# Altium PCB Switch Expand.PcbDoc
Units mil, origin at the board's own origin, x right, y up, seen from the top; angles counter-clockwise.
Board outline 3275 x 7000 mil, 2 copper layers (Top Layer, Bottom Layer); 16 components, 17 nets, 64 pads, 0 vias.
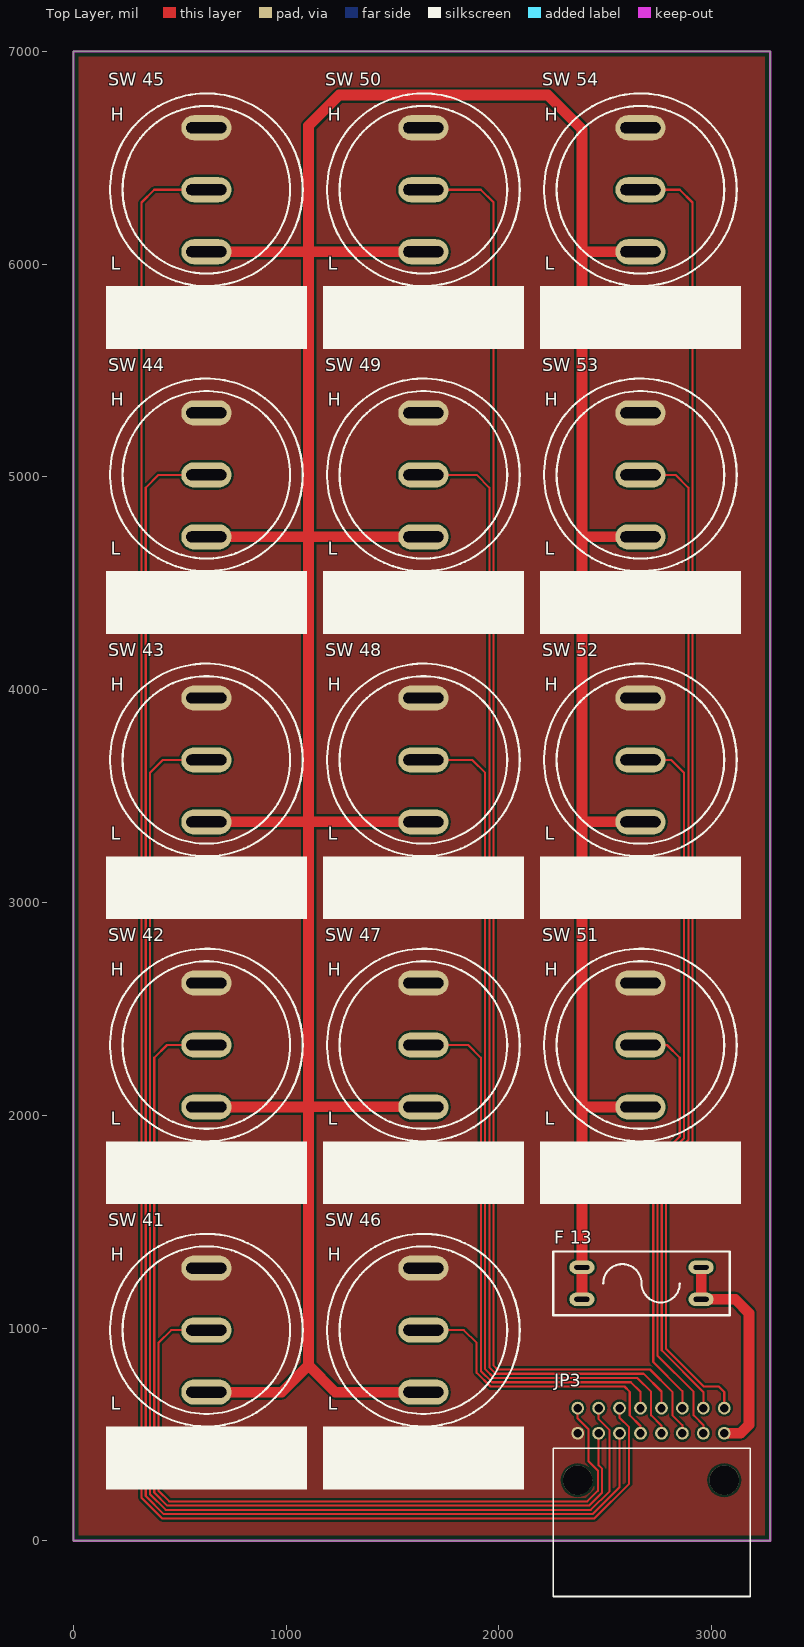
[diagram p0: Top Layer view]
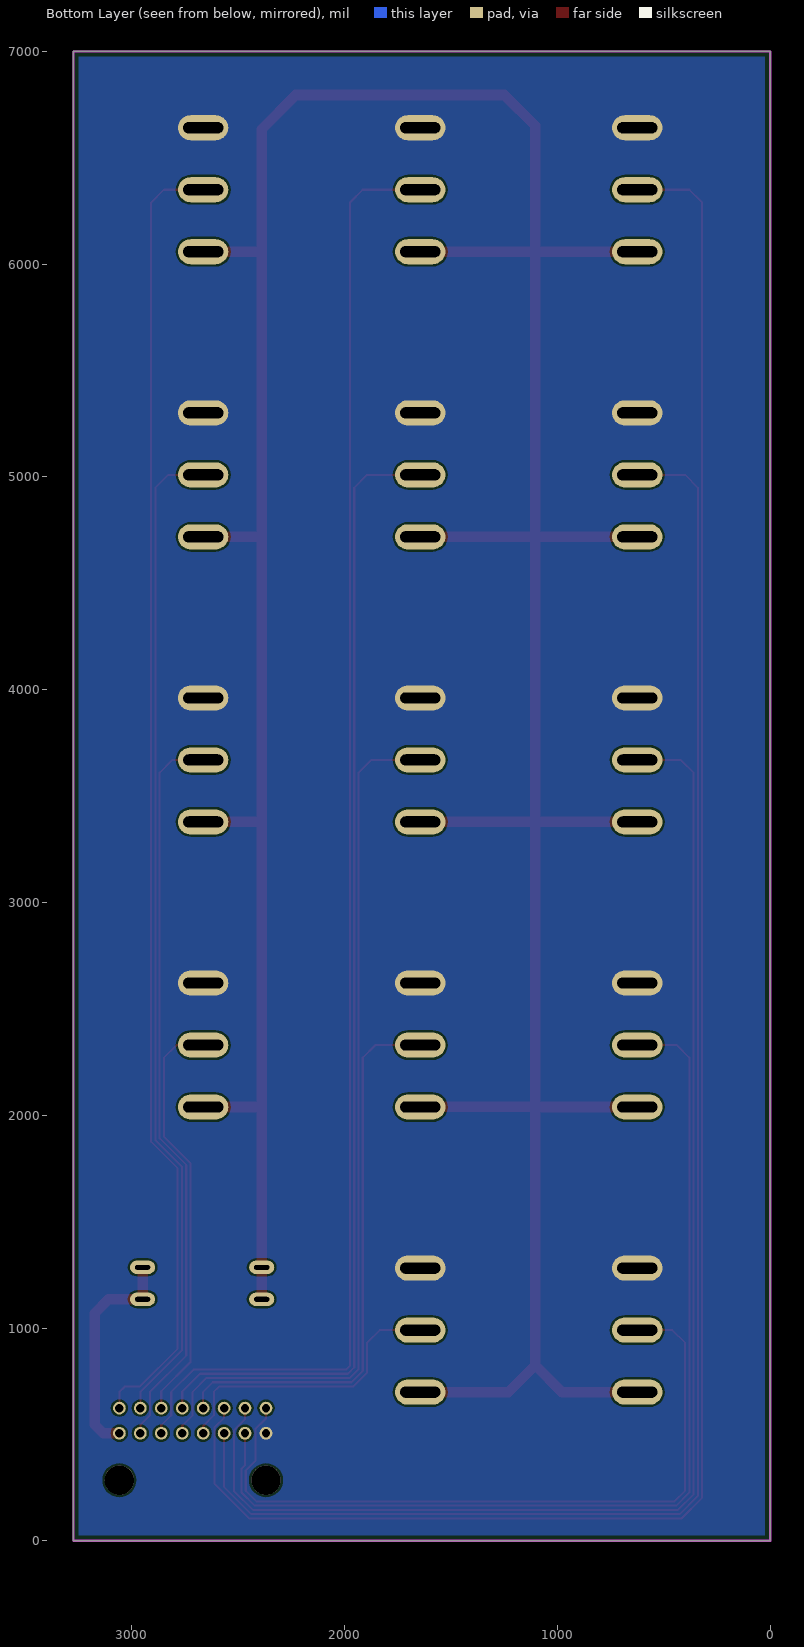
[diagram p1: Bottom Layer view, seen from below]

## Layer stack, top to bottom
Top Layer: signal copper 1.4
Dielectric: dielectric 12.6, FR-4, Dk 4.8
Bottom Layer: signal copper 1.4

## Board outline
0,0 0,7000 3275,7000 3275,0

## Design rules (kind name [scope] priority, off if disabled: settings)
Clearance [All] p1: gap=10
PolygonConnect [All] p1: connectstyle=Direct reliefconductorwidth=10 reliefentries=4 polygonreliefangle="90 Angle" airgapwidth=10
RoutingVias [All] p1: holewidth=28 width=50 viastyle="Through Hole" minholewidth=28 minwidth=50 maxholewidth=28 maxwidth=50
SolderMaskExpansion [All] p1: expansion=4
Width [All] p1: maxlimit=100 minlimit=10 preferedwidth=10
28 further rules are at their usual default settings.

## Components (designator, comment, footprint, x,y, rotation, side; value= is the part's Value field where it differs from the comment)
"F 13" "Fuse" FUSE-2pin 2670,1210 r180 top
JP3 "1318832-2" AMP1318832-2 2370,285 r0 top
"SW 41" "SW-SPDT" Switch-KCD1 625,990 r0 top
"SW 42" "SW-SPDT" Switch-KCD1 625,2330 r0 top
"SW 43" "SW-SPDT" Switch-KCD1 625,3670 r0 top
"SW 44" "SW-SPDT" Switch-KCD1 625,5010 r0 top
"SW 45" "SW-SPDT" Switch-KCD1 625,6350 r0 top
"SW 46" "SW-SPDT" Switch-KCD1 1645,990 r0 top
"SW 47" "SW-SPDT" Switch-KCD1 1645,2330 r0 top
"SW 48" "SW-SPDT" Switch-KCD1 1645,3670 r0 top
"SW 49" "SW-SPDT" Switch-KCD1 1645,5010 r0 top
"SW 50" "SW-SPDT" Switch-KCD1 1645,6350 r0 top
"SW 51" "SW-SPDT" Switch-KCD1 2665,2330 r0 top
"SW 52" "SW-SPDT" Switch-KCD1 2665,3670 r0 top
"SW 53" "SW-SPDT" Switch-KCD1 2665,5010 r0 top
"SW 54" "SW-SPDT" Switch-KCD1 2665,6350 r0 top

## Footprints (in the part's own frame and the unit in brackets; to place one, negate y for a bottom-side part, rotate by r counter-clockwise, add the part's x,y. Pads: shape width x height; smd on the part's side, far side on the other; paste and mask are expansions set on the pad)
AMP1318832-2 [mm] "AMP1318832-2"
  round 3.5 hole 3.5: " "(0,0) " "(17.5,0)
  round 1.524 hole 1: B1(17.5,8.6) B2(15,8.6) B3(12.5,8.6) B4(10,8.6) B5(7.5,8.6) B6(5,8.6) B7(2.5,8.6) B8(0,8.6) B9(17.5,5.6) B10(15,5.6) B11(12.5,5.6) B12(10,5.6) B13(7.5,5.6) B14(5,5.6) B15(2.5,5.6) B16(0,5.6)
  silkscreen extent -2.91,-13.9 20.59,3.8
FUSE-2pin [mm] "车用保险丝"
  oval 3x1.6 hole 0.55 slot 1.8 at 0 deg: 1(-7.112,-1.905) 1(-7.112,1.905) 2(7.112,-1.905) 2(7.112,1.905)
  silkscreen extent -10.53,-3.81 10.53,3.81
Switch-KCD1 [mm]
  oval 6x3 hole 1.3 slot 4.8 at 0 deg: 1(0,7.4) 2(0,0) 3(0,-7.4)
  silkscreen extent -12,-19 12,11.5

## Part data
"F 13": library part "Fuse 2"
"SW 41" "SW 42" "SW 43" "SW 44" "SW 45" "SW 46" "SW 47" "SW 48" "SW 49" "SW 50" "SW 51" "SW 52" "SW 53" "SW 54": "SPDT Subminiature Toggle Switch, Right Angle Mounting, Vertical Actuation"

## Nets (pads, with @x,y where several pads share a name; then routed paths per layer and width w, separated by ;. In a path a pad name is that pad's centre, name@x,y a point inside that pad or via, vN(x,y) a via of type N, cw(c..) or ccw(c..) an arc to the next point about the centre after c; other vN are vias at no path point)
GND: "SW 41.1" "SW 42.1" "SW 43.1" "SW 44.1" "SW 45.1" "SW 46.1" "SW 47.1" "SW 48.1" "SW 49.1" "SW 50.1" "SW 51.1" "SW 52.1" "SW 53.1" "SW 54.1" JP3.B16
"POWER 3": "F 13.1" JP3.B9 | length 1059.3
  Top Layer w50: 2950,1285 2950,1135 3110,1135 3175,1070 3175,545 3135.47,505.47 JP3.B9
"SW 41": "SW 41.2" JP3.B8 | length 3479.2
  Top Layer w10: 625,990 460,990 400,930 400,235 450,185 2415,185 2465,235 2465,330 2420,375 2420,525 2370,575 JP3.B8
"SW 42": "SW 42.2" JP3.B15 | length 4754.9
  Top Layer w10: 625,2330 440,2330 380,2270 380,226.72 441.72,165 2423.28,165 2485,226.72 2485,338.28 2468.43,354.86 JP3.B15
"SW 43": "SW 43.2" JP3.B7 | length 6320
  Top Layer w10: 625,3670 420,3670 360,3610 360,218.43 433.43,145 2431.57,145 2520,233.43 2520,520 2468.43,571.57 JP3.B7
"SW 44": "SW 44.2" JP3.B14 | length 7617.9
  Top Layer w10: 625,5010 400,5010 340,4950 340,210.15 425.15,125 2439.85,125 2566.85,252 JP3.B14
"SW 45": "SW 45.2" JP3.B6 | length 9191.3
  Top Layer w10: 625,6350 380,6350 320,6290 320,201.86 416.86,105 2448.14,105 2611.85,268.71 2611.85,533.15 2566.85,578.15 JP3.B6
"SW 46": "SW 46.2" JP3.B13 | length 1387.5
  Top Layer w10: 1645,990 1835,990 1895,930 1895,790 1960,725 2590,725 2615,700 2615,590 2665.28,539.72 JP3.B13
"SW 47": "SW 47.2" JP3.B5 | length 2633.8
  Top Layer w10: 1645,2330 1855,2330 1915,2270 1915,798.28 1968.28,745 2620,745 2665.28,699.72 JP3.B5
"SW 48": "SW 48.2" JP3.B12 | length 4157.1
  Top Layer w10: 1645,3670 1875,3670 1935,3610 1935,806.57 1976.57,765 2650,765 2715,700 2715,590 2763.7,541.3 JP3.B12
"SW 49": "SW 49.2" JP3.B4 | length 5403.5
  Top Layer w10: 1645,5010 1895,5010 1955,4950 1955,814.85 1984.85,785 2680,785 2763.7,701.3 JP3.B4
"SW 50": "SW 50.2" JP3.B11 | length 6926.8
  Top Layer w10: 1645,6350 1915,6350 1975,6290 1975,823.14 1993.14,805 2710,805 2815,700 2815,590 2862.13,542.87 JP3.B11
"SW 51": "SW 51.2" JP3.B3 | length 1964.8
  Top Layer w10: 2665,2330 2790,2330 2850,2270 2850,1900 2725,1775 2725,840 2862.13,702.87 JP3.B3
"SW 52": "SW 52.2" JP3.B10 | length 3475.4
  Top Layer w10: 2665,3670 2810,3670 2870,3610 2870,1891.72 2745,1766.72 2745,870 2915,700 2915,590 2960.55,544.45 JP3.B10
"SW 53": "SW 53.2" JP3.B2 | length 4709
  Top Layer w10: 2665,5010 2830,5010 2890,4950 2890,1883.43 2765,1758.43 2765,895 2960.55,699.45 JP3.B2
"SW 54": "SW 54.2" JP3.B1 | length 6142.3
  Top Layer w10: 2665,6350 2850,6350 2910,6290 2910,1875.15 2785,1750.15 2785,903.28 2963.28,725 3032.95,725 3058.98,698.98 JP3.B1
SWITCH_POWER: "F 13.2" "SW 41.3" "SW 42.3" "SW 43.3" "SW 44.3" "SW 45.3" "SW 46.3" "SW 47.3" "SW 48.3" "SW 49.3" "SW 50.3" "SW 51.3" "SW 52.3" "SW 53.3" "SW 54.3" | length 19016.2
  Top Layer w50: 625,698.66 978.66,698.66 1105,825 ; 625,2038.66 1103.66,2038.66 1105,2040 ; 625,3378.66 1103.66,3378.66 ; 625,4718.66 1105,4718.66 ; 625,6058.66 1105,6058.66 ; 1108.66,4718.66 1645,4718.66 ; 1116.34,3378.66 1645,3378.66 ; 1643.66,2040 1105,2040 ; 1645,698.66 1231.34,698.66 1105,825 ; 1645,6058.66 1105,6058.66 ; 2390,1135 2390,1285 2390,6635 2230,6795 1250,6795 1105,6650 1105,6058.66 ; 2391.34,2038.66 2665,2038.66 ; 2391.34,3378.66 2665,3378.66 ; 2391.34,6058.66 2665,6058.66 ; 2393.66,4718.66 2665,4718.66 ; 1105,825 1105,2040 ; 1105,2040 1105,4718.66 ; 1105,4718.66 1105,6058.66
pads on no net: "JP3. "

## Polygon pours and split planes (outlines as drawn)
GND on Bottom Layer "Bottom Layer-No Net" (solid, pour order 5): 25,25 25,6975 3250,6975 3250,25
GND on Top Layer "Bottom Layer-No Net" (solid, pour order 3): 25,25 25,6975 3250,6975 3250,25

## Keep-outs
Keep-Out Layer:
  the board outline again, w10

## Text inside footprints (layer, text, board x,y; h text height)
JP3: Mechanical 13 "B2" at 2940.55,623.58 h25; Mechanical 13 "B3" at 2842.13,623.58 h25; Mechanical 13 "B1" at 3038.98,623.58 h25; Mechanical 13 "B9" at 3038.98,505.47 h25; Mechanical 13 "B16" at 2340,505.47 h25; Mechanical 13 "B15" at 2438.43,505.47 h25; Mechanical 13 "B14" at 2536.85,505.47 h25; Mechanical 13 "B13" at 2635.28,505.47 h25; Mechanical 13 "B12" at 2733.7,505.47 h25; Mechanical 13 "B8" at 2350,623.58 h25; Mechanical 13 "B7" at 2448.43,623.58 h25; Mechanical 13 "B6" at 2546.85,623.58 h25; Mechanical 13 "B5" at 2645.28,623.58 h25; Mechanical 13 "B4" at 2743.7,623.58 h25; Mechanical 13 "B11" at 2832.13,505.47 h25; Mechanical 13 "B10" at 2930.55,505.47 h25
"SW 41": Top Overlay "H" at 175,1315 h60; Top Overlay "L" at 175,615 h60
"SW 42": Top Overlay "H" at 175,2655 h60; Top Overlay "L" at 175,1955 h60
"SW 43": Top Overlay "H" at 175,3995 h60; Top Overlay "L" at 175,3295 h60
"SW 44": Top Overlay "H" at 175,5335 h60; Top Overlay "L" at 175,4635 h60
"SW 45": Top Overlay "H" at 175,6675 h60; Top Overlay "L" at 175,5975 h60
"SW 46": Top Overlay "H" at 1195,1315 h60; Top Overlay "L" at 1195,615 h60
"SW 47": Top Overlay "H" at 1195,2655 h60; Top Overlay "L" at 1195,1955 h60
"SW 48": Top Overlay "H" at 1195,3995 h60; Top Overlay "L" at 1195,3295 h60
"SW 49": Top Overlay "H" at 1195,5335 h60; Top Overlay "L" at 1195,4635 h60
"SW 50": Top Overlay "H" at 1195,6675 h60; Top Overlay "L" at 1195,5975 h60
"SW 51": Top Overlay "H" at 2215,2655 h60; Top Overlay "L" at 2215,1955 h60
"SW 52": Top Overlay "H" at 2215,3995 h60; Top Overlay "L" at 2215,3295 h60
"SW 53": Top Overlay "H" at 2215,5335 h60; Top Overlay "L" at 2215,4635 h60
"SW 54": Top Overlay "H" at 2215,6675 h60; Top Overlay "L" at 2215,5975 h60